# Altium PCB machnguon.PcbDoc
Units mm, origin at the board's own origin, x right, y up, seen from the top; angles counter-clockwise.
Board outline 40.01 x 45.09 mm, 2 copper layers (Top Layer, Bottom Layer); 14 components, 7 nets, 34 pads, 0 vias.
Unrouted connection lines stored in the file: 27.
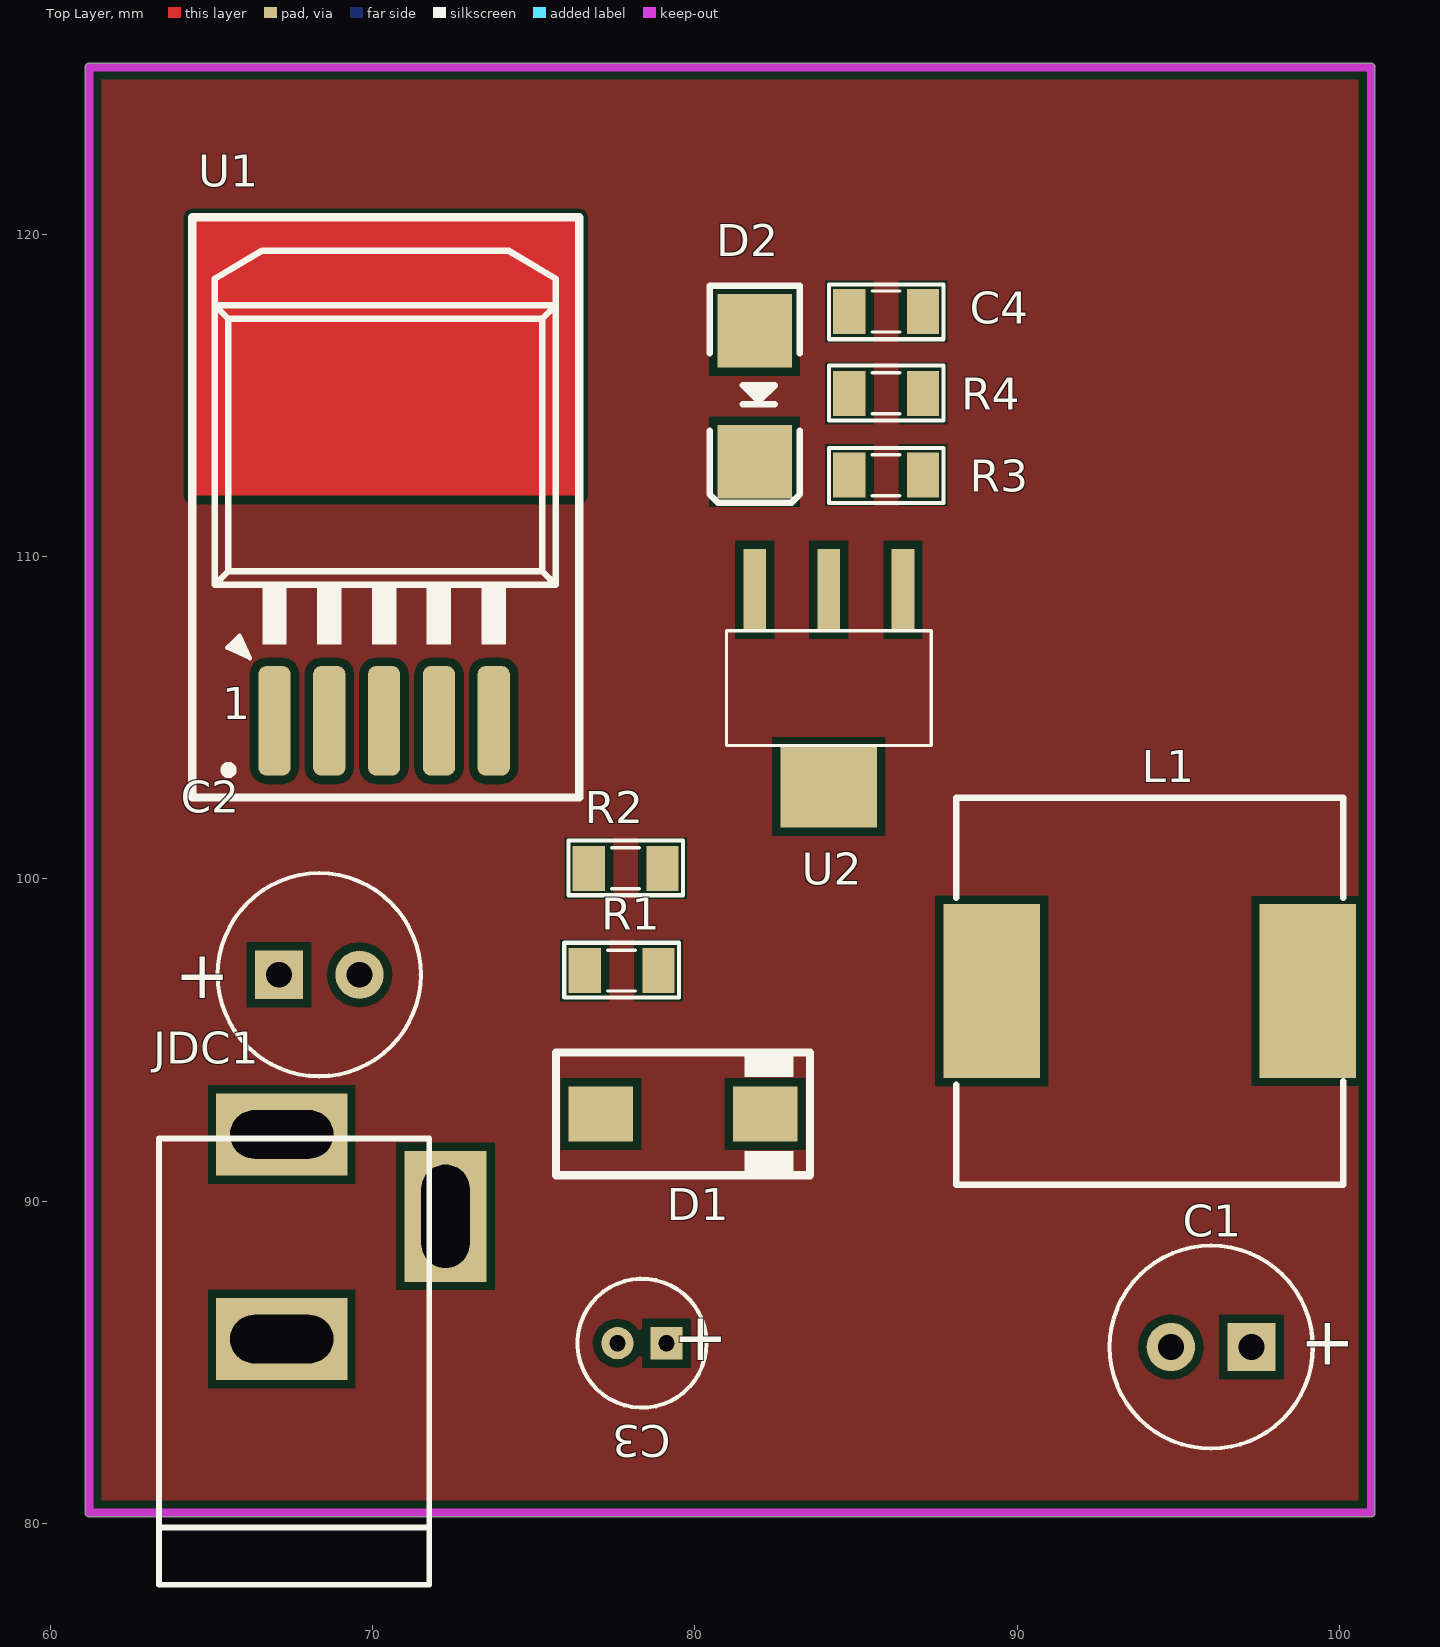
[diagram p0: Top Layer view]
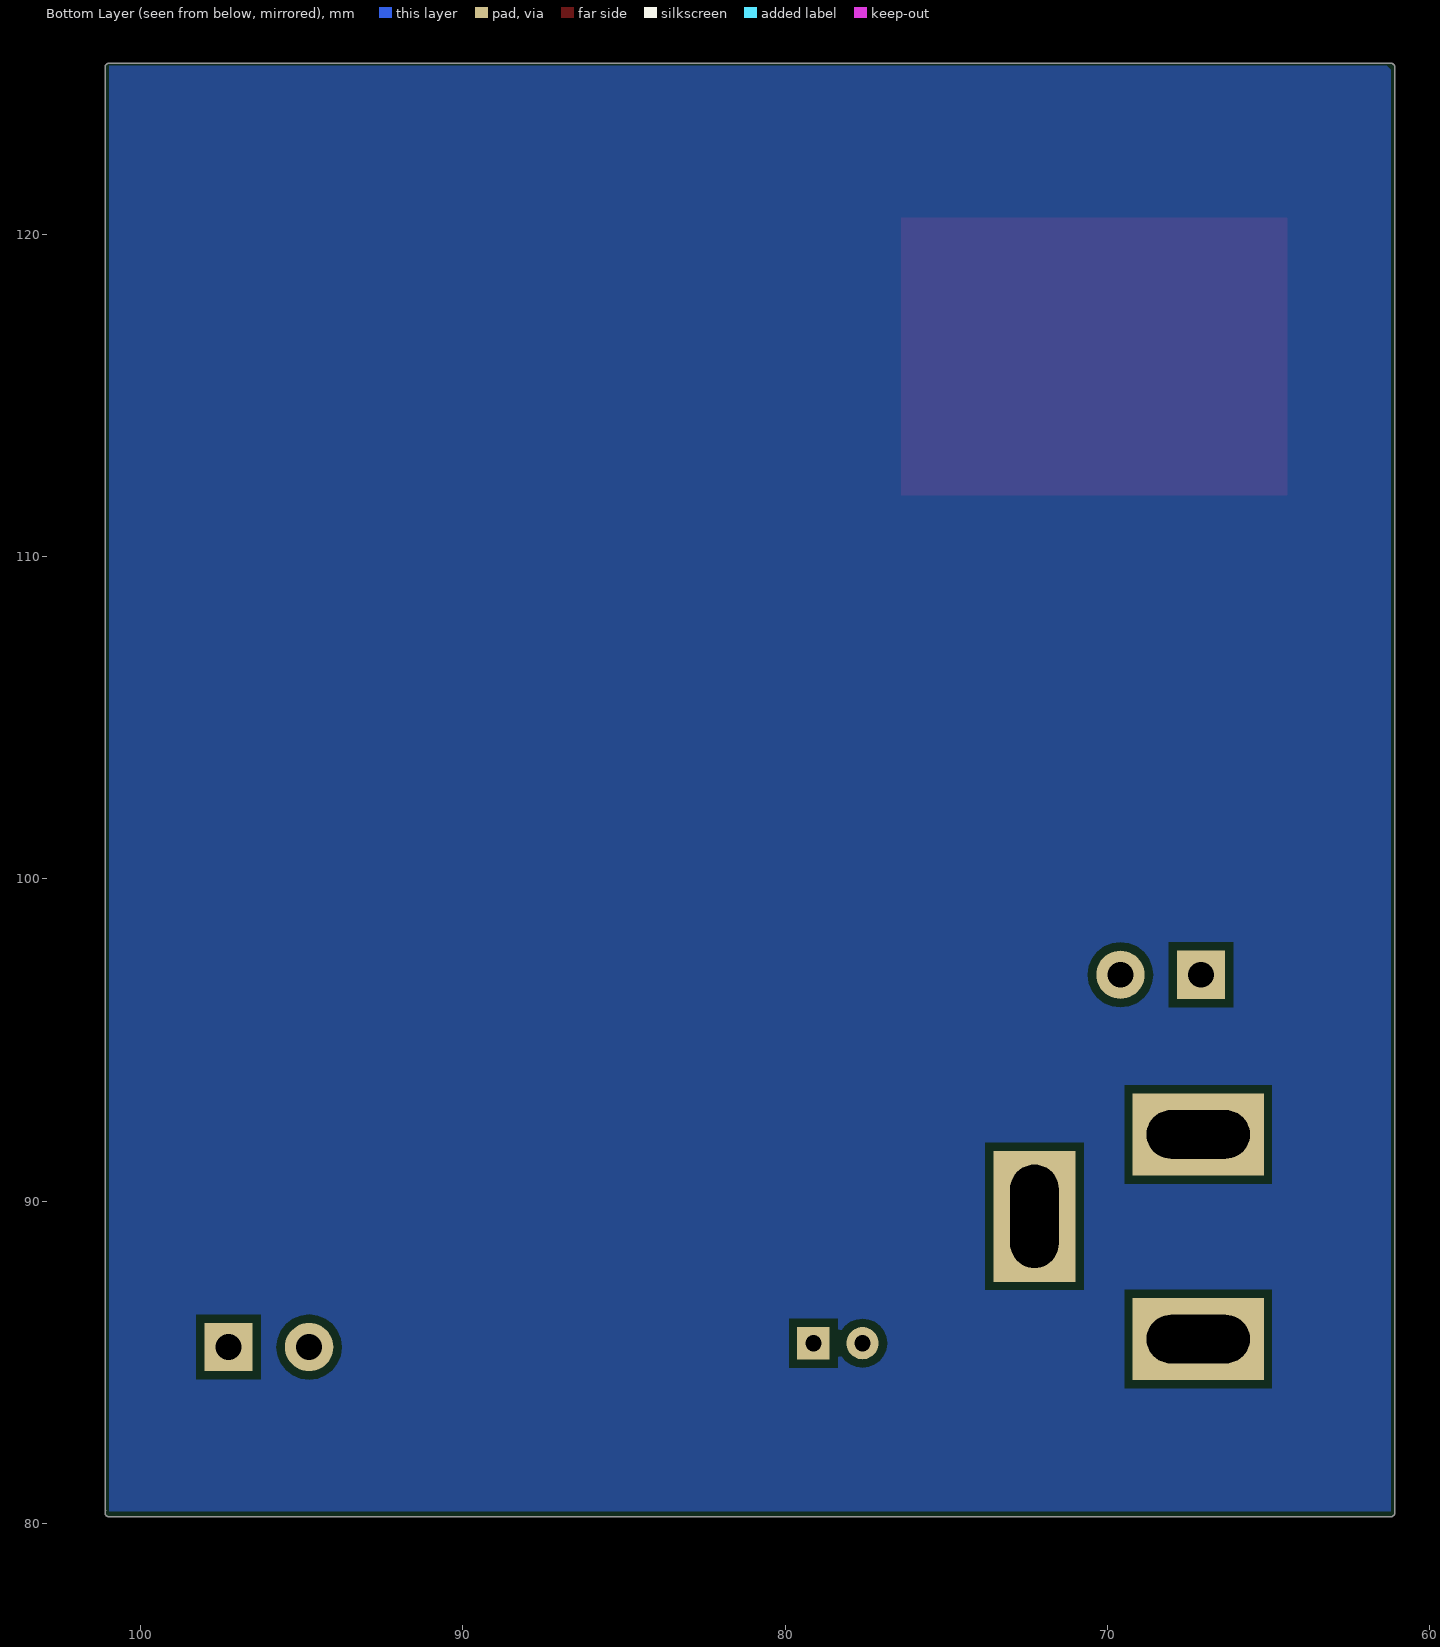
[diagram p1: Bottom Layer view, seen from below]

## Layer stack, top to bottom
Top Solder: solder mask 0.0102, Solder Resist, Dk 3.5
Top Layer: signal copper 0.0356
Dielectric 1: dielectric 0.32, FR-4, Dk 4.8
Bottom Layer: signal copper 0.0356
Bottom Solder: solder mask 0.0102, Solder Resist, Dk 3.5

## Board outline
61.087,80.391 61.087,125.095 cw(c61.214,125.095) 61.093,125.135 cw(c61.214,125.174) 61.214,125.301 100.965,125.301 cw(c100.965,125.174) 101.092,125.174 101.092,80.47 cw(c100.965,80.47) 101.075,80.406 cw(c100.965,80.343) 101.092,80.343 cw(c100.965,80.343) 100.965,80.216 61.214,80.216 cw(c61.214,80.343) 61.089,80.367 cw(c61.214,80.391)

## Design rules (kind name [scope] priority, off if disabled: settings)
Clearance "Stitching GND" [IsStitchingVia and InNet('GND') vs (IsVia and (Not IsStitchingVia)) Or IsPad] p1: gap=0.127 ignorepadtopadclearanceinfootprint=FALSE
Clearance [All] p2: gap=0.254 ignorepadtopadclearanceinfootprint=TRUE except(0: Arc-Hole Track-Hole SMDPad-Hole THPad-Hole Via-Hole Fill-Hole Poly-Hole Region-Hole Text-Hole)
PolygonConnect [All] p1: connectstyle=Relief reliefconductorwidth=0.254 reliefentries=4 polygonreliefangle="90 Angle" airgapwidth=0.254
RoutingVias [All] p1: holewidth=0.711 width=1.27 viastyle="Through Hole" minholewidth=0.711 minwidth=1.27 maxholewidth=0.711 maxwidth=1.27
SolderMaskExpansion [All] p1: expansion=0.102
Width [All] p1: maxlimit=1.27 minlimit=0.381 preferedwidth=0.762 minimp=50.000000 maximp=50.000000 favimp=50.000000
30 further rules are at their usual default settings.

## Components (designator, comment, footprint, x,y, rotation, side; value= is the part's Value field where it differs from the comment)
C1 "100uF/25V" CA-ALU-6.3 96.012,85.479 r180 top
C2 "100uF/25V" CA-ALU-6.3 68.346,97.028 r0 top
C3 "22uF/16V" CA-ALU-4 78.359,85.598 r180 top
C4 "0.1uF/50V" CAP_0805 85.931,117.602 r0 top value=33p
D1 "1N5822" SMA 79.629,92.71 r0 top value="Diode c?m 1N5408"
D2 "Diode SMD" DIO-SMD-106 81.853,114.975 r90 top value=1N5007
JDC1 "Jac DC" DC-IN 69.723,88.9 r90 top
L1 "22mH" L-SMD-M-12x10 94.107,96.52 r90 top value="150 mH"
R1 "1K" RES-SMD-0805 77.724,97.155 r180 top
R2 "3K" RES-SMD-0805 77.851,100.33 r180 top
R3 "510" RES-SMD-0805 85.931,112.522 r0 top
R4 "820" RES-SMD-0805 85.931,115.062 r180 top
U1 "LM2976" TO263 69.977,110.871 r0 top
U2 "LM1117-ADJ" LM1117-SOP 84.153,107.696 r180 top

## Footprints (in the part's own frame and the unit in brackets; to place one, negate y for a bottom-side part, rotate by r counter-clockwise, add the part's x,y. Pads: shape width x height; smd on the part's side, far side on the other; paste and mask are expansions set on the pad)
CA-ALU-4 [mm] "Polarized capacitors, Aluminum Electrolytic Capacitors, 2-Leads, Body 5x11x2x0.5"
  rect 1x1 hole 0.5: 1(-0.762,0)
  round 1 hole 0.5: 2(0.762,0)
  silkscreen extent -2,-2 2,2, body extent -2,-1.97 2,2.03, height 7.5
CA-ALU-6.3 [mm] "Polarized capacitors, Aluminum Electrolytic Capacitors, 2-Leads, Body 6.3x15x2.5x0.5"
  rect 1.5x1.5 hole 0.8: 1(-1.25,0)
  round 1.5 hole 0.8: 2(1.25,0)
  silkscreen extent -3.15,-3.15 3.15,3.15, body extent -3.12,-3.15 3.18,3.15, height 11
CAP_0805 [mil]
  rect 39.37x55 smd: 1(-45,0) 2(45,0)
  silkscreen extent -70,-34 70,33, body extent -40,-25 40,25, height 24
DC-IN [mm] "Jac DC input"
  rect 2.54x4.064 hole 1.5 slot 3.2 at 90 deg: 1(3.175,2.54) 2(-3.175,2.54)
  rect 4.064x2.54 hole 1.5 slot 3.2 at 0 deg: 3(0.635,-2.54)
  silkscreen extent -10.79,-2.03 3.05,6.35, body extent -10.42,-2.67 3.4,6.84, height 11.02
DIO-SMD-106 [mil]
  rect 90x90.55 smd: 1(80,0) 2(-80,0)
  silkscreen extent -130,-55 135,55, body extent -99,-50 106,52, height 95
L-SMD-M-12x10 [mm] "WE-PDA SMD Shielded Power Inductor, 1210"
  rect 5.4x3 smd: 1(0,4.9) 2(0,-4.9)
  silkscreen extent -6,-6 6,6, body extent -6,-6 6,6, height 9.7
LM1117-SOP [mm]
  rect 0.7x2.54 smd: 1(-2.3,-1.27) 2(0,-1.27) 3(2.3,-1.27)
  rect 3x2.54 smd: 2(0,4.826)
  silkscreen extent -3.18,0 3.17,3.56, body extent -3.25,-1.78 3.25,5.18, height 1.68
RES-SMD-0805 [mil]
  rect 39.37x55 smd: 1(-45,0) 2(45,0)
  silkscreen extent -70,-34 70,33, body extent -39,-25 39,25, height 31
SMA [mm]
  rect 2x1.7 smd: 1(-2.544,0) 2(2.544,0)
  silkscreen extent -3.94,-1.9 3.94,1.91, body extent -2.87,-1.4 2.87,1.4, height 2.29
TO263 [mm]
  rrect50% 1x3.4 smd: 1(-3.019,-5.969) 2(-1.319,-5.969) 4(2.081,-5.969) 5(3.781,-5.969)
  rrect50% 1x3.4 smd mask+0: 3(0.381,-5.969)
  Top Layer region: -5.568,1.016 6.432,1.016 6.432,9.65 -5.568,9.65
  silkscreen extent -5.57,-8.35 6.43,9.65, body extent -4.73,-6.84 5.43,7.8, height 4.57

## Part data
C1 C2 C3: library part "Cap Pol", "Polarized Capacitor (Axial)", LatestRevisionDate=17-Jul-2002, LatestRevisionNote="Re-released for DXP Platform.", PackageReference=POLAR0.8, Published=8-Jun-2000, Publisher="Altium Limited"
C4: library part CapSMD, "Capacitor", LatestRevisionDate=17-Jul-2002, LatestRevisionNote="Re-released for DXP Platform.", PackageReference=RAD-0.3, Published=8-Jun-2000, Publisher="Altium Limited"
D1: "Schottky Rectifiers"
D2: "Default Diode", Code - JEDEC=DO-214-AB, Published=8-Jun-2000, Publisher="Altium Limited", Revision="July-2002: Re-released for DXP Platform."
JDC1: library part DCIN, "Jac DC input"
L1: library part Inductor, "Inductor"
R1 R2 R3 R4: library part "Resistor - SMD", "Resistor SMD", Manufacturer="Generic Components", Class=Passive, Published=08/06/2000, Publisher="Altium Hobart Technology Centre"
U1: library part LM2596, Max Input Voltage="12 V", Max Output Current="3 (6.0 peak) A", Max Output Voltage=mV, Temperature Range="-40 to +125 degC", Category=IC-Power, Min Input Voltage=mV, Min Output Voltage=mV, Mounting Technology="Surface Mount", Status=Unreleased, Supply Voltage=mV
U2: "800mA Low-Dropout Linear Regulator", Creator="Nguyen Ba Bien", Website=http://group3i.net

## Nets (pads, with @x,y where several pads share a name; then routed paths per layer and width w, separated by ;. In a path a pad name is that pad's centre, name@x,y a point inside that pad or via, vN(x,y) a via of type N, cw(c..) or ccw(c..) an arc to the next point about the centre after c; other vN are vias at no path point)
+3.3: C3.1 D2.1 R3.1 U2.2
+5: C1.1 D2.2 L1.2 R2.2 U2.3
GND: C1.2 C2.2 C3.2 C4.1 D1.1 JDC1.2 JDC1.3 R1.1 R4.2 U1.3 U1.5
NetC2_1: C2.1 JDC1.1 U1.1
NetC4_2: C4.2 R3.2 R4.1 U2.1
NetD1_2: D1.2 L1.1 U1.2
NetR1_2: R1.2 R2.1 U1.4

## Polygon pours and split planes (outlines as drawn)
no net on Bottom Layer (solid, pour order 10): 61.214,125.095 61.341,125.222 100.965,125.222 100.965,80.391 61.214,80.391
no net on Bottom Layer (solid, pour order 12): 76.454,78.359
no net on Top Layer (solid, pour order 18): 61.849,79.248
no net on Top Layer (solid, pour order 16): 61.087,78.867
no net on Top Layer (solid, pour order 14): 61.214,125.095 100.965,125.095 100.965,80.391 100.917,80.343 61.214,80.343

## Keep-outs
Top Layer:
  lines w0.254: 61.214,80.343 100.965,80.343 ; 61.214,80.391 61.214,125.095 ; 61.214,125.174 100.965,125.174 100.965,125.095 100.965,80.391 100.965,80.47

## Dimensions
100.965,125.174 to 100.965,80.343 on Mechanical 15
100.965,125.174 to 61.214,125.174 on Mechanical 15

## Text inside footprints (layer, text, board x,y; h text height)
C1: Top Overlay "+" at 100.487,86.216 h1.5 r180
C2: Top Overlay "+" at 63.871,96.291 h1.5
C3: Top Overlay "+" at 81.026,86.36 h1.5 r180
U1: Top Overlay "1" at 65.332,104.953 h1